# EAGLE board PCB-3 v24 (EAGLE 9.7.0)
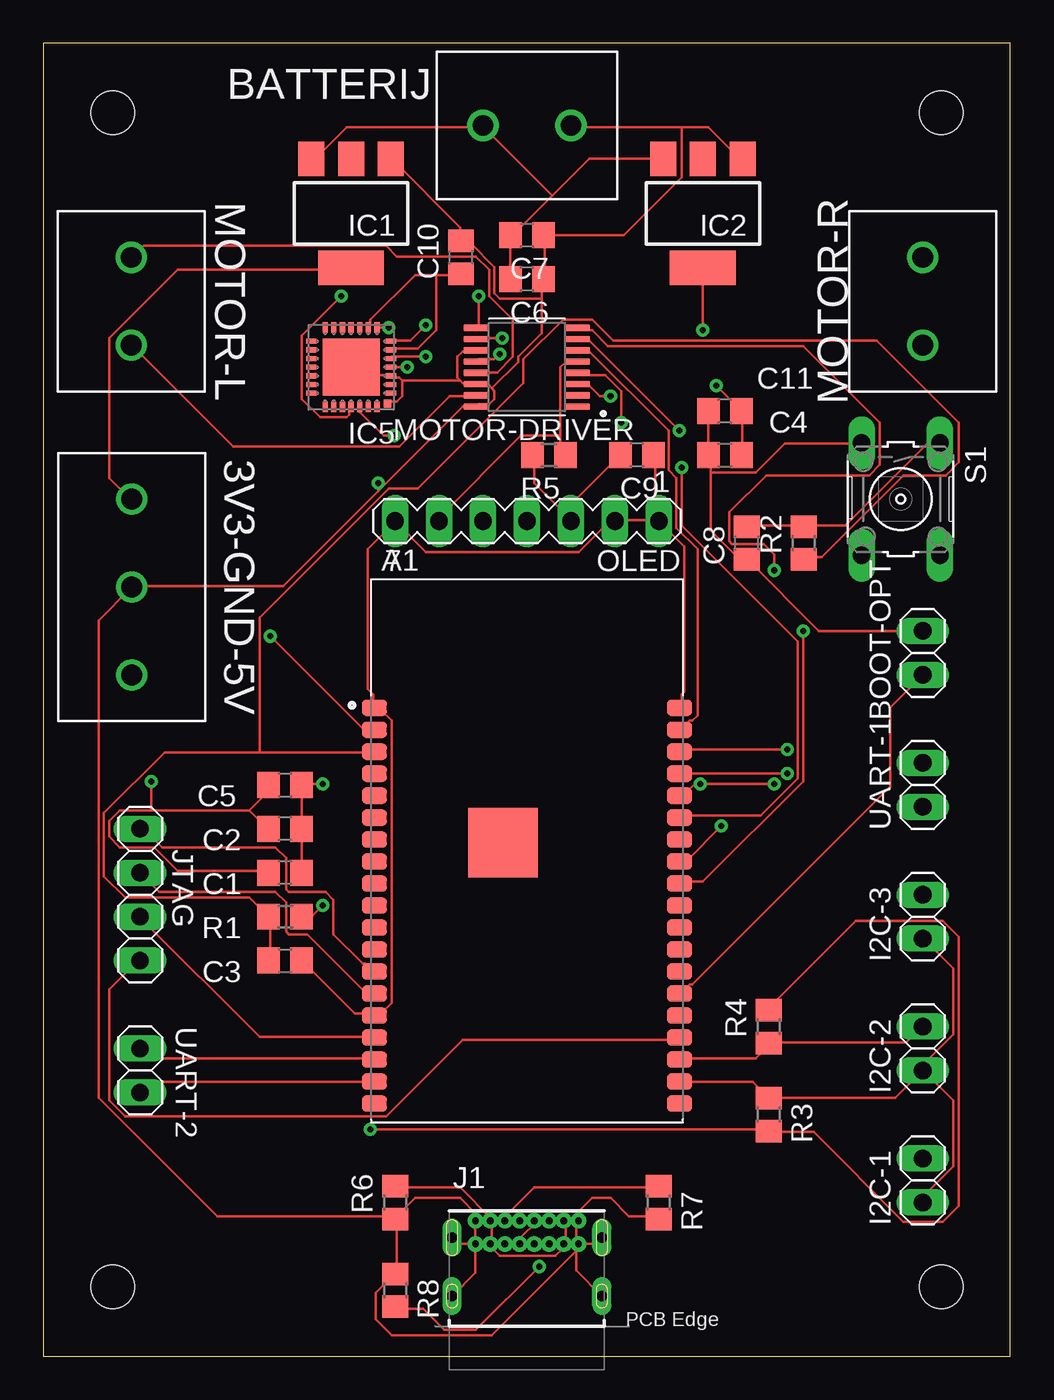
[diagram p0: board, top side]
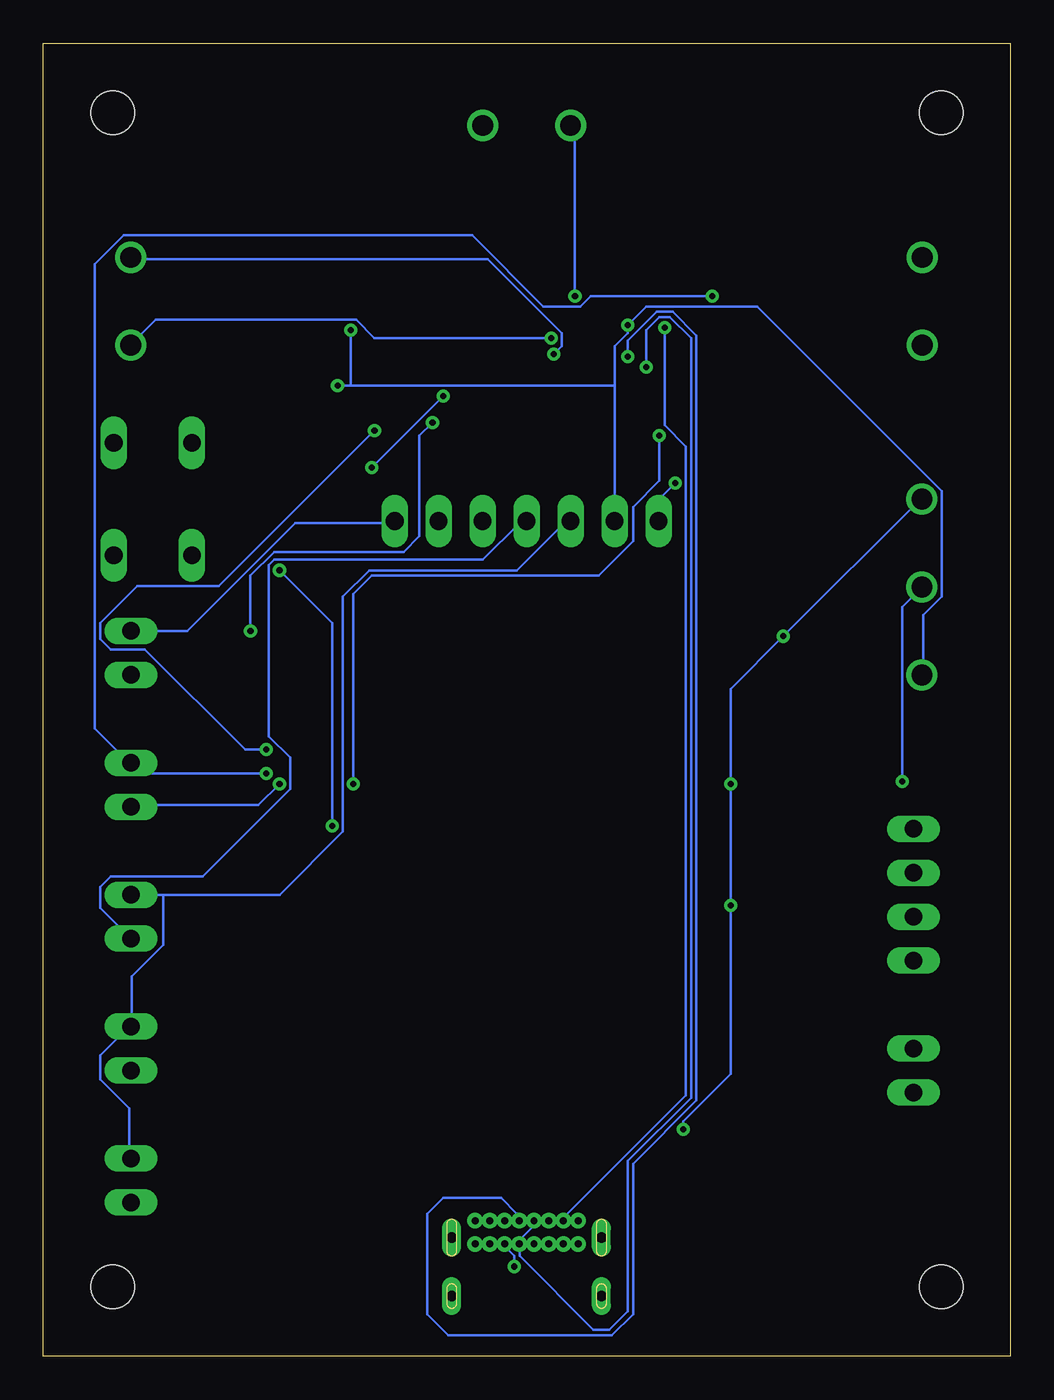
[diagram p1: board, bottom side, seen from below]

Size 55.86 x 75.87 mm. Coordinates in mm from the lower left corner, seen from the top.
Outline: 23.32,7.6 23.32,7.63 23.32,7.66 23.32,7.68 23.33,7.71 23.34,7.73 23.36,7.75 23.37,7.78 23.39,7.8 23.4,7.82 23.42,7.84 23.44,7.85 23.46,7.86 23.49,7.88 23.51,7.89 23.54,7.89 23.56,7.9 23.59,7.9 23.61,7.91 23.64,7.9 23.67,7.9 23.69,7.89 23.72,7.89 23.74,7.88 23.77,7.86 23.79,7.85 23.81,7.84 23.83,7.82 23.84,7.8 23.86,7.78 23.88,7.75 23.89,7.73 23.9,7.71 23.91,7.68 23.91,7.66 23.91,7.63 23.91,7.6 23.91,6.1 23.91,6.08 23.91,6.05 23.91,6.03 23.9,6 23.89,5.98 23.88,5.95 23.86,5.93 23.84,5.91 23.83,5.89 23.81,5.88 23.79,5.86 23.77,5.84 23.74,5.83 23.72,5.82 23.69,5.81 23.67,5.81 23.64,5.81 23.61,5.8 23.59,5.81 23.56,5.81 23.54,5.81 23.51,5.82 23.49,5.83 23.46,5.84 23.44,5.86 23.42,5.88 23.4,5.89 23.39,5.91 23.37,5.93 23.36,5.95 23.34,5.98 23.33,6 23.32,6.03 23.32,6.05 23.32,6.08 23.32,6.1 23.32,7.6
Outline: 32.01,4.02 32.02,4.05 32.03,4.07 32.05,4.09 32.07,4.1 32.09,4.12 32.12,4.13 32.14,4.15 32.16,4.16 32.19,4.16 32.21,4.17 32.24,4.17 32.27,4.17 32.29,4.17 32.32,4.17 32.34,4.16 32.37,4.16 32.39,4.15 32.41,4.13 32.44,4.12 32.46,4.1 32.48,4.09 32.49,4.07 32.51,4.05 32.52,4.02 32.54,4 32.55,3.98 32.55,3.95 32.56,3.93 32.56,3.9 32.56,3.88 32.56,3.07 32.56,3.05 32.56,3.02 32.55,3 32.55,2.97 32.54,2.95 32.52,2.92 32.51,2.9 32.49,2.88 32.48,2.86 32.46,2.84 32.44,2.83 32.41,2.81 32.39,2.8 32.37,2.79 32.34,2.78 32.32,2.78 32.29,2.78 32.27,2.77 32.24,2.78 32.21,2.78 32.19,2.78 32.16,2.79 32.14,2.8 32.12,2.81 32.09,2.83 32.07,2.84 32.05,2.86 32.03,2.88 32.02,2.9 32.01,2.92 31.99,2.95 31.98,2.97 31.98,3 31.97,3.02 31.97,3.05 31.96,3.07 31.96,3.88 31.97,3.9 31.97,3.93 31.98,3.95 31.98,3.98 31.99,4 32.01,4.02
Outline: 31.96,7.6 31.97,7.63 31.97,7.66 31.98,7.68 31.98,7.71 31.99,7.73 32.01,7.75 32.02,7.78 32.03,7.8 32.05,7.82 32.07,7.84 32.09,7.85 32.12,7.86 32.14,7.88 32.16,7.89 32.19,7.89 32.21,7.9 32.24,7.9 32.27,7.91 32.29,7.9 32.32,7.9 32.34,7.89 32.37,7.89 32.39,7.88 32.41,7.86 32.44,7.85 32.46,7.84 32.48,7.82 32.49,7.8 32.51,7.78 32.52,7.75 32.54,7.73 32.55,7.71 32.55,7.68 32.56,7.66 32.56,7.63 32.56,7.6 32.56,6.1 32.56,6.08 32.56,6.05 32.55,6.03 32.55,6 32.54,5.98 32.52,5.95 32.51,5.93 32.49,5.91 32.48,5.89 32.46,5.88 32.44,5.86 32.41,5.84 32.39,5.83 32.37,5.82 32.34,5.81 32.32,5.81 32.29,5.81 32.27,5.8 32.24,5.81 32.21,5.81 32.19,5.81 32.16,5.82 32.14,5.83 32.12,5.84 32.09,5.86 32.07,5.88 32.05,5.89 32.03,5.91 32.02,5.93 32.01,5.95 31.99,5.98 31.98,6 31.98,6.03 31.97,6.05 31.97,6.08 31.96,6.1 31.96,7.6
Outline: 23.32,3.95 23.33,3.98 23.34,4 23.36,4.02 23.37,4.05 23.39,4.07 23.4,4.09 23.42,4.1 23.44,4.12 23.46,4.13 23.49,4.15 23.51,4.16 23.54,4.16 23.56,4.17 23.59,4.17 23.61,4.17 23.64,4.17 23.67,4.17 23.69,4.16 23.72,4.16 23.74,4.15 23.77,4.13 23.79,4.12 23.81,4.1 23.83,4.09 23.84,4.07 23.86,4.05 23.88,4.02 23.89,4 23.9,3.98 23.91,3.95 23.91,3.93 23.91,3.9 23.91,3.88 23.91,3.07 23.91,3.05 23.91,3.02 23.91,3 23.9,2.97 23.89,2.95 23.88,2.92 23.86,2.9 23.84,2.88 23.83,2.86 23.81,2.84 23.79,2.83 23.77,2.81 23.74,2.8 23.72,2.79 23.69,2.78 23.67,2.78 23.64,2.78 23.61,2.77 23.59,2.78 23.56,2.78 23.54,2.78 23.51,2.79 23.49,2.8 23.46,2.81 23.44,2.83 23.42,2.84 23.4,2.86 23.39,2.88 23.37,2.9 23.36,2.92 23.34,2.95 23.33,2.97 23.32,3 23.32,3.02 23.32,3.05 23.32,3.07 23.32,3.88 23.32,3.9 23.32,3.93 23.32,3.95
Outline: 0,75.87 0,0 55.86,0 55.86,75.87 0,75.87
Copper layers (1*16): Top 0.035mm / dielectric 1.5mm / Bottom 0.035mm
Design rules "default": minimum track width 6mil, minimum drill 0.35mm, track to track 6mil, track to pad 6mil, pad to pad 6mil, via to via 6mil, smd to smd 6mil, copper to edge 40mil, drill to drill 6mil, minimum pad ring 10mil, minimum via ring 8mil, stop-mask expansion 4mil, vias tented up to drill 0mil, thermal gap 10mil
Holes 2.5 mm at 4,71.87 51.86,71.87 4,4 51.86,4

## Footprints (pad centres in the part's own frame; a part is rotated, then mirrored left to right if it is on the bottom)
TERMBLK_508-3N = drill 1.2: 1 0,0; 2 5.08,0; 3 10.16,0
XCVR_ESP32-WROVER-I = smd 1.45 x 0.93: 1 -8.81,8.26; 2 -8.81,6.99; 3 -8.81,5.72; 4 -8.81,4.45; 5 -8.81,3.18; 6 -8.81,1.91; 7 -8.81,0.64; 8 -8.81,-0.63; 9 -8.81,-1.9; 10 -8.81,-3.17; 11 -8.81,-4.44; 12 -8.81,-5.71; 13 -8.81,-6.98; 14 -8.81,-8.25; 15 -8.81,-9.52; 16 -8.81,-10.79; 17 -8.81,-12.06; 18 -8.81,-13.33; 19 -8.81,-14.6; 20 8.81,-14.6; 21 8.81,-13.33; 22 8.81,-12.06; 23 8.81,-10.79; 24 8.81,-9.52; 25 8.81,-8.25; 26 8.81,-6.98; 27 8.81,-5.71; 28 8.81,-4.44; 29 8.81,-3.17; 30 8.81,-1.9; 31 8.81,-0.63; 32 8.81,0.64; 33 8.81,1.91; 34 8.81,3.18; 35 8.81,4.45; 36 8.81,5.72; 37 8.81,6.99; 38 8.81,8.26 | smd 4 x 4: 39 -1.38,0.47
TERMBLK_508-2N = drill 1.2: 1 0,0; 2 5.08,0
1X02 = drill 1.016 long: 1 -1.27,0; 2 1.27,0
C0805 = smd 1.3 x 1.5: 1 -0.95,0; 2 0.95,0
SOT223 = smd 1.5 x 2: 1 -2.3,-3.15; 2 0,-3.15; 3 2.3,-3.15 | smd 3.8 x 2: 4 0,3.15
MLP28 = smd 0.6 x 0.3: 1 -2.3,1.5; 2 -2.3,1; 3 -2.3,0.5; 4 -2.3,0; 5 -2.3,-0.5; 6 -2.3,-1; 7 -2.3,-1.5; 15 2.3,-1.5; 16 2.3,-1; 17 2.3,-0.5; 18 2.3,0; 19 2.3,0.5; 20 2.3,1; 21 2.3,1.5 | smd 0.3 x 0.6: 8 -1.5,-2.3; 9 -1,-2.3; 10 -0.5,-2.3; 11 0,-2.3; 12 0.5,-2.3; 13 1,-2.3; 14 1.5,-2.3; 22 1.5,2.3; 23 1,2.3; 24 0.5,2.3; 25 0,2.3; 26 -0.5,2.3; 27 -1,2.3; 28 -1.5,2.3 | smd 3.3 x 3.3: EXP 0,0 | smd 0.435 x 0.435: M -2.103,2.103
GCT_USB4085-GF-A_REVA4 = drill 0.4 pad 0.65: A1 -2.975,4.025; A4 -2.125,4.025; A5 -1.275,4.025; A6 -0.425,4.025; A7 0.425,4.025; A8 1.275,4.025; A9 2.125,4.025; A12 2.975,4.025; B1 2.975,2.675; B4 2.125,2.675; B5 1.275,2.675; B6 0.425,2.675; B7 -0.425,2.675; B8 -1.275,2.675; B9 -2.125,2.675; B12 -2.975,2.675 | drill 0.6 pad 1.108 long: P1 -4.325,3.045; P2 4.325,3.045; P3 4.325,-0.335; P4 -4.325,-0.335
1X04 = drill 1.016 long: 1 -3.81,0; 2 -1.27,0; 3 1.27,0; 4 3.81,0
SOP65P640X110-16N = smd 1.49 x 0.4: 1 -2.915,2.275; 2 -2.915,1.625; 3 -2.915,0.975; 4 -2.915,0.325; 5 -2.915,-0.325; 6 -2.915,-0.975; 7 -2.915,-1.625; 8 -2.915,-2.275; 9 2.915,-2.275; 10 2.915,-1.625; 11 2.915,-0.975; 12 2.915,-0.325; 13 2.915,0.325; 14 2.915,0.975; 15 2.915,1.625; 16 2.915,2.275
MA07-1 = drill 1.016 long: 1 -7.62,0; 2 -5.08,0; 3 -2.54,0; 4 0,0; 5 2.54,0; 6 5.08,0; 7 7.62,0
R0805 = smd 1.3 x 1.5: 1 -0.95,0; 2 0.95,0
B3F-10XX = drill 1.016 long: 1 -3.251,2.261; 2 3.251,2.261; 3 -3.251,-2.261; 4 3.251,-2.261

## Placement (x,y rotation side)
3V3-GND-5V  2828XX-3282837-3  [TERMBLK_508-3N]  5.11,49.53 270 top
A1  ESP32-WROVER-I  [XCVR_ESP32-WROVER-I]  27.94,29.21 0 top
BATTERIJ  2828XX-2282837-2  [TERMBLK_508-2N]  25.4,71.12 0 top
BOOT-OPT  PINHD-1X2  [1X02]  50.8,40.64 90 top
C1  22uF  [C0805]  13.97,27.94 180 top
C2  0.1uF  [C0805]  13.97,30.48 180 top
C3  0.1uF  [C0805]  13.97,22.86 0 top
C4  10uF  [C0805]  39.37,52.07 0 top
C5  10uF  [C0805]  13.97,33.02 0 top
C6  100nF  [C0805]  27.94,62.23 180 top
C7  100nF  [C0805]  27.94,64.77 180 top
C8  0.1uF  [C0805]  40.64,46.99 90 top
C9  100nF  [C0805]  34.29,52.07 180 top
C10  1uF  [C0805]  24.13,63.5 90 top
C11  1uF  [C0805]  39.37,54.61 180 top
I2C-1  PINHD-1X2  [1X02]  50.8,10.16 90 top
I2C-2  PINHD-1X2  [1X02]  50.8,17.78 90 top
I2C-3  PINHD-1X2  [1X02]  50.8,25.4 90 top
IC1  LD117AS33TR  [SOT223]  17.78,66.04 180 top
IC2  LD117AS50TR  [SOT223]  38.1,66.04 180 top
IC5  CP2102  [MLP28]  17.78,57.15 180 top
J1  USB4085-GF-A_REVA4  [GCT_USB4085-GF-A_REVA4]  27.94,3.81 0 top
JTAG  PINHD-1X4  [1X04]  5.59,26.67 270 top
MOTOR-DRIVER  TC78H621FNG  [SOP65P640X110-16N]  27.94,57.15 180 top
MOTOR-L  2828XX-2282837-2  [TERMBLK_508-2N]  5.08,58.42 90 top
MOTOR-R  2828XX-2282837-2  [TERMBLK_508-2N]  50.8,63.5 270 top
OLED  [MA07-1]  27.94,48.26 180 top
R1  10k  [R0805]  13.97,25.4 180 top
R2  10k  [R0805]  43.93,46.99 90 top
R3  4k7  [R0805]  41.91,13.97 270 top
R4  4k7  [R0805]  41.91,19.05 90 top
R5  10k  [R0805]  29.21,52.07 180 top
R6  10k  [R0805]  20.32,8.89 90 top
R7  5.1k  [R0805]  35.56,8.89 270 top
R8  5.1k  [R0805]  20.32,3.81 270 top
S1  [B3F-10XX]  49.53,49.53 270 top
UART-1  PINHD-1X2  [1X02]  50.8,33.02 90 top
UART-2  PINHD-1X2  [1X02]  5.59,16.51 270 top

## Library data of the parts
3V3-GND-5V = Connector; CATEGORY: Connector; DESCRIPTION: TERM BLK 3P SIDE ENT 5.08mm PCB; MANUFACTURER: TE Connectivity; MPN: 282837-3; OPERATING_TEMPERATURE: -40°C to +105°C; PART_STATUS: Active; ROHS_COMPLIANCE: RoHS Compliant; SERIES: 282837; SUBCATEGORY: Terminal Block; TYPE: Side Wire Entry
A1 = ESP32-WROVER-I; DESCRIPTION: Module: combo; GPIO, I2C x2, I2S x2, SDIO, SPI x3, UART x3; U.FL; DIGI-KEY_PART_NUMBER: 1904-1008-1-ND; DIGI-KEY_PURCHASE_URL: https://www.digikey.com/product-detail/en/espressif-systems/ESP32-WROVER-I/1904-1008-1-ND/8544303?utm_source=snapeda&utm_medium=aggregator&utm_campaign=symbol; MF: Espressif Systems; MP: ESP32-WROVER-I; PACKAGE: Module Espressif Systems
BATTERIJ MOTOR-L MOTOR-R = Connector; CATEGORY: Connector; DESCRIPTION: 2 Position Wire to Board Terminal Block Horizontal with Board 5.08 mm Through Hole; MANUFACTURER: TE Connectivity; MPN: 282837-2; OPERATING_TEMPERATURE: -40°C to +105°C; PART_STATUS: ACTIVE; ROHS_COMPLIANCE: RoHS Compliant; SERIES: 282837; SUBCATEGORY: Terminal Block; TYPE: Side Wire Entry
BOOT-OPT I2C-1-I2C-3 JTAG UART-1 UART-2 = Connector; CATEGORY: CONNECTOR; SUB-CATEGORY: PIN-HEADER
C1-C11 = rcl; SPICEPREFIX: C
IC1 IC2 = v-reg
IC5 = silabs; MF: FARNELL; MPN: CP2102-GM; OC_FARNELL: 9282130; OC_NEWARK: 30K5635
J1 = USB4085-GF-A_REVA4; MANUFACTURER: Global Connector Technology; MAXIMUM_PACKAGE_HEIGHT: 3.46mm; PARTREV: A4; STANDARD: Manufacturer Recommendations
MOTOR-DRIVER = TC78H621FNG
OLED = con-lstb; OC_FARNELL: unknown; OC_NEWARK: unknown
R1-R8 = rcl; SPICEPREFIX: R
S1 = switch-omron; MPN: B3F-1000; OC_FARNELL: 176432; OC_NEWARK: 36M3542

## Nets
3V3: 3V3-GND-5V.1 A1.2 C1.1 C2.1 C5.2 IC1.4 R1.1 R3.2 R4.2
5V: 3V3-GND-5V.3 C4.2 C11.1 IC2.4 IC5.7 MOTOR-DRIVER.5 OLED.6 R5.1
7V: BATTERIJ.1 C6.2 C7.2 IC1.3 IC2.3 MOTOR-DRIVER.9
AO1: MOTOR-DRIVER.15 MOTOR-L.1
AO2: MOTOR-DRIVER.13 MOTOR-L.2
BO1: MOTOR-DRIVER.12 MOTOR-R.1
BO2: MOTOR-DRIVER.10 MOTOR-R.2
D+: IC5.4 J1.A6 J1.B6
D-: IC5.5 J1.A7 J1.B7
EN: A1.3 C3.1 R1.2 R2.1
EXP: A1.39
GND: 3V3-GND-5V.2 A1.1 A1.15 A1.38 BATTERIJ.2 BOOT-OPT.2 C1.2 C2.2 C3.2 C4.1 C5.1 C6.1 C7.1 C8.1 C9.1 C10.2 C11.2 IC1.1 IC2.1 IC5.3 IC5.EXP IC5.M J1.A1 J1.A12 J1.B1 J1.B12 J1.P1 J1.P2 J1.P3 J1.P4 MOTOR-DRIVER.11 MOTOR-DRIVER.14 MOTOR-DRIVER.16 OLED.1 OLED.2 OLED.7 R6.1 R7.2 R8.1 S1.3
IO0: A1.25 BOOT-OPT.1
IO12: A1.14 JTAG.2
IO13: A1.16 JTAG.3
IO14: A1.13 JTAG.1
IO15: A1.23 JTAG.4
IO18: A1.30 MOTOR-DRIVER.4
IO19: A1.31 MOTOR-DRIVER.8
IO21: A1.33 MOTOR-DRIVER.3
IO22: A1.36 MOTOR-DRIVER.7
IO23: A1.37 MOTOR-DRIVER.6
N$1: J1.A5 R7.1
N$2: C9.2 OLED.3 R5.2
N$3: C8.2 R2.2 S1.1
N$4: J1.B5 R8.2
N$5: C10.1 IC5.6 IC5.9
RX-1: A1.34 IC5.26 UART-1.1
RX-2: A1.17 UART-2.1
SCL: A1.22 I2C-1.2 I2C-2.2 I2C-3.2 OLED.5 R4.1
SDA: A1.21 I2C-1.1 I2C-2.1 I2C-3.1 OLED.4 R3.1
TX-1: A1.35 IC5.25 UART-1.2
TX-2: A1.18 UART-2.2
VBUS: IC5.8 J1.A4 J1.A9 J1.B4 J1.B9 R6.2

## Tracks (layer width: path | path; a pad name or v marks a point on that pad's centre or on a via)
3V3  (via drill 0.35)
  Top 0.152: R4.2 41.91,20.12 46.94,25.15 51.97,25.15 52.88,24.23 52.88,8.69 51.97,7.77 49.68,7.77 44.5,12.95 41.91,12.95 R3.2 41.91,13.11 v18.9,13.11 | 14.94,30.48 14.94,28.04 C1.1 | 14.94,30.48 14.94,32.92 C5.2 14.94,33.07 v16.15,33.07 | 14.94,30.48 C2.1 | v13.11,41.61 18.44,36.27 19.05,36.27 A1.2 | v16.15,26.06 15.54,25.45 14.94,25.45 R1.1 | IC1.4 17.68,62.79 7.77,62.79 3.81,58.83 3.81,50.75 5.03,49.53 3V3-GND-5V.1
  Bottom 0.152: 3V3-GND-5V.1 5.18,49.53 v13.11,41.61 16.15,38.56 v16.15,33.07 v16.15,26.06 16.15,16.31 18.9,13.56 v18.9,13.11
5V  (via drill 0.35)
  Top 0.152: 29.87,53.19 29.87,52.27 30.02,52.12 R5.1 | 29.87,53.19 29.87,57.15 30.18,57.45 30.79,57.45 MOTOR-DRIVER.5 | C4.2 40.39,52.12 40.39,54.56 C11.1 40.23,54.71 v38.86,56.08 | v22.1,59.59 21.18,58.67 20.12,58.67 IC5.7 | 29.87,53.19 27.58,53.19 22.86,48.46 OLED.6 | v38.1,59.28 IC2.4
  Bottom 0.152: OLED.6 22.86,56.08 | 22.86,56.08 22.86,58.37 22.1,59.13 v22.1,59.59 21.03,60.66 14.63,60.66 3.96,49.99 3.96,43.89 5.03,42.82 5.03,39.47 3V3-GND-5V.3 | 22.86,56.08 38.1,56.08 | 38.1,56.08 v38.86,56.08 | 38.1,56.08 v38.1,59.28
7V  (via drill 0.35)
  Top 0.152: C6.2 26.98,62.33 26.98,64.77 C7.2 27.13,64.77 29.41,67.06 | 29.41,67.06 31.55,69.19 35.66,69.19 IC2.3 | v25.15,61.27 25.15,59.44 MOTOR-DRIVER.9 | IC1.3 15.54,69.34 15.85,69.34 17.53,71.02 25.3,71.02 BATTERIJ.1 25.45,71.02 29.41,67.06
  Bottom 0.152: v25.15,61.27 25.15,70.87 BATTERIJ.1
AO1
  Top 0.152: MOTOR-DRIVER.15 24.99,55.47 23.47,55.47 20.57,52.58 10.97,52.58 5.18,58.37 MOTOR-L.1
AO2
  Top 0.152: MOTOR-DRIVER.13 25.15,56.84 26.21,56.84 27.13,57.76 27.13,59.89 25.76,61.27 25.76,62.79 24.99,63.55 20.42,63.55 19.81,64.16 5.79,64.16 5.18,63.55 MOTOR-L.2
BO1  (via drill 0.35)
  Top 0.152: v26.36,57.91 26.06,57.61 25.15,57.61 MOTOR-DRIVER.12
  Bottom 0.152: v26.36,57.91 25.91,58.37 25.91,59.13 30.18,63.4 50.75,63.4 MOTOR-R.1
BO2  (via drill 0.35)
  Top 0.152: v26.52,58.83 25.15,58.83 MOTOR-DRIVER.10
  Bottom 0.152: v26.52,58.83 36.73,58.83 37.8,59.89 49.38,59.89 50.75,58.52 MOTOR-R.2
D+  (via drill 0.35)
  Top 0.152: v21.03,57.15 IC5.4
  Bottom 0.152: v21.03,57.15 21.03,59.28 20.27,60.05 19.66,60.05 18.44,58.83 18.44,14.93 22.1,11.28 22.1,2.59 23.16,1.52 24.08,1.52 28.35,5.79 28.35,6.4 J1.B6 28.5,6.55 27.58,7.47 27.58,7.77 J1.A6
D-  (via drill 0.35)
  Top 0.152: v22.1,57.76 20.12,57.76 IC5.5 | J1.B7 27.58,6.55 27.58,6.86 28.5,7.77 J1.A7
  Bottom 0.152: v22.1,57.76 22.1,58.67 20.42,60.35 19.51,60.35 18.14,58.98 18.14,14.78 21.79,11.12 21.79,2.44 23.01,1.22 32.46,1.22 33.68,2.44 33.68,8.23 32.77,9.14 29.41,9.14 28.5,8.23 28.5,7.92 J1.A7
EN
  Top 0.152: 12.5,34.9 7.01,34.9 3.5,31.39 3.5,27.74 4.72,26.52 11.89,26.52 12.95,25.45 R1.2 13.11,25.3 13.11,22.86 C3.1 | 12.5,34.9 19.05,34.9 A1.3 | 12.5,34.9 12.5,42.67 19.96,50.14 21.64,50.14 27.74,56.24 27.74,57.61 30.02,59.89 31.7,59.89 32.92,58.67 48.16,58.67 52.88,53.95 52.88,51.66 52.12,50.9 49.68,50.9 44.96,46.18 44.04,46.18 R2.1
GND  (via drill 0.35)
  Top 0.152: C11.2 38.41,54.56 38.41,52.12 C4.1 38.56,51.97 38.56,51.05 | 38.56,51.05 38.56,47.7 40.08,46.18 40.54,46.18 C8.1 40.69,46.02 44.81,41.91 BOOT-OPT.2 | 38.56,51.05 41.15,51.05 42.82,52.73 47.24,52.73 S1.3 | A1.38 36.88,37.49 36.88,38.25 37.03,38.41 37.03,46.79 OLED.1 35.51,48.31 | 35.51,48.31 35.36,48.46 35.36,51.97 C9.1 | 35.51,48.31 33.07,48.31 OLED.2 32.92,48.16 32.61,48.16 30.94,46.48 22.1,46.48 OLED.7 20.27,48.16 18.75,46.63 18.75,38.56 19.05,38.25 19.05,37.49 A1.1 19.2,37.34 19.51,37.34 20.12,36.73 20.12,20.42 19.51,19.81 19.2,19.81 A1.15 19.05,19.81 17.98,19.81 14.94,22.86 C3.2 | R7.2 35.51,8.08 33.83,8.08 32.77,9.14 31.7,9.14 30.79,8.23 30.79,7.92 J1.A12 30.79,7.77 30.79,6.55 J1.B1 | R6.1 20.42,7.92 20.42,4.88 R8.1 20.27,4.72 19.2,3.66 19.2,2.13 20.12,1.22 25.91,1.22 30.79,6.1 | R6.1 20.42,8.08 21.49,9.14 24.08,9.14 24.99,8.23 24.99,7.92 J1.A1 J1.B12 | 30.79,6.1 30.79,6.4 J1.B1 | 36.88,71.02 30.48,71.02 BATTERIJ.2 | 36.88,71.02 38.41,71.02 40.08,69.34 40.39,69.34 IC2.1 | 11.89,31.55 6.25,31.55 | 6.25,31.55 4.42,31.55 3.81,30.94 3.81,30.02 4.42,29.41 6.4,29.41 7.77,28.04 12.95,28.04 C1.2 | 11.89,31.55 12.95,30.48 C2.2 | 11.89,31.55 12.95,32.61 12.95,32.92 C5.1 | IC1.1 20.12,69.19 24.08,65.23 24.08,64.47 C10.2 24.23,64.31 24.69,64.31 26.06,62.94 26.06,61.42 26.36,61.11 28.8,61.11 | 20.73,56.39 20.73,55.47 20.42,55.17 19.96,55.17 IC5.M | 20.73,56.39 20.57,56.54 20.12,56.54 IC5.3 19.96,56.69 18.29,56.69 17.83,57.15 IC5.EXP | 28.96,64.77 28.96,62.33 C6.1 28.8,62.18 28.8,61.11 | 25.91,55.93 25.76,56.08 25.15,56.08 MOTOR-DRIVER.14 24.99,56.24 24.23,56.24 24.08,56.39
  Top 0.152: 25.91,55.93 26.06,55.78 26.06,55.32 25.76,55.02 25.15,55.02 MOTOR-DRIVER.16 24.99,54.86 24.23,54.86 19.36,49.99 | 24.08,56.39 23.93,56.54 23.93,57.76 24.23,58.06 24.99,58.06 MOTOR-DRIVER.11 | 28.8,61.11 28.8,59.13 27.43,57.76 27.43,57.45 25.91,55.93 | 24.08,56.39 20.73,56.39 | 19.36,49.99 13.87,44.5 5.18,44.5 3V3-GND-5V.2 5.03,44.35 3.2,42.52 3.2,14.93 10.06,8.08 20.27,8.08 R6.1 | v6.25,33.22 6.25,31.55 | 36.88,71.02 36.88,68.12 33.53,64.77 28.96,64.77 | 28.96,64.77 C7.1 | 19.36,49.99 v19.36,50.44 | J1.P1 23.98,6.48 J1.B12 | J1.P4 24.96,4.82 J1.B12 | J1.P2 31.89,6.48 J1.B1 | J1.P3 30.79,4.95 30.79,6.1
  Bottom 0.152: BOOT-OPT.2 47.55,41.91 41.3,48.16 35.66,48.16 OLED.1 | v6.25,33.22 6.25,43.28 5.18,44.35 3V3-GND-5V.2 | v19.36,50.44 20.27,49.53 20.27,48.31 OLED.7
IO0
  Top 0.152: BOOT-OPT.1 48.92,37.49 48.92,32.92 37.49,21.49 37.34,21.49 36.88,21.03 A1.25
IO12
  Top 0.152: JTAG.2 6.71,26.82 13.41,26.82 14.02,26.21 14.02,24.54 14.17,24.38 15.24,24.38 18.59,21.03 19.05,21.03 A1.14
IO13
  Top 0.152: A1.16 19.05,18.44 12.5,18.44 5.64,25.3 JTAG.3
IO14
  Top 0.152: JTAG.1 5.79,30.48 6.86,29.41 13.41,29.41 14.02,28.8 14.02,26.98 14.17,26.82 16.31,26.82 16.76,26.36 16.76,24.38 18.44,22.71 18.59,22.71 19.05,22.25 A1.13
IO15
  Top 0.152: A1.23 36.73,18.29 24.23,18.29 19.81,13.87 4.72,13.87 3.81,14.78 3.81,21.18 5.49,22.86 JTAG.4
IO18  (via drill 0.35)
  Top 0.152: v43.89,41.91 43.89,33.22 38.1,27.43 36.88,27.43 A1.30 | v33.38,53.95 33.38,55.78 32.46,56.69 30.94,56.69 MOTOR-DRIVER.4
  Bottom 0.152: v43.89,41.91 43.89,45.11 42.52,46.48 35.05,46.48 34.14,47.4 34.14,53.19 v33.38,53.95
IO19  (via drill 0.35)
  Top 0.152: v39.17,30.63 37.19,28.65 36.88,28.65 A1.31 | v42.22,45.41 42.22,46.33 41.6,46.94 39.78,46.94 39.62,47.09 39.62,48.77 41.76,50.9 47.7,50.9 48.31,51.51 48.31,53.95 43.89,58.37 32.61,58.37 31.7,59.28 30.94,59.28 MOTOR-DRIVER.8
  Bottom 0.152: v39.17,30.63 39.17,42.37 v42.22,45.41
IO21  (via drill 0.35)
  Top 0.152: v36.88,51.36 36.88,48.01 43.59,41.3 43.59,33.38 41.45,31.24 36.88,31.24 A1.33 | v32.77,55.47 32.16,55.47 31.55,56.08 30.94,56.08 MOTOR-DRIVER.3
  Bottom 0.152: v32.77,55.47 v36.88,51.36
IO22  (via drill 0.35)
  Top 0.152: v42.98,35.05 36.88,35.05 A1.36 | v36.73,53.49 31.55,58.67 30.94,58.67 MOTOR-DRIVER.7
  Bottom 0.152: v42.98,35.05 44.2,35.05 49.99,40.84 51.97,40.84 52.58,41.45 52.58,42.37 50.44,44.5 45.72,44.5 v36.73,53.49
IO23
  Top 0.152: A1.37 36.88,36.27 37.34,36.73 37.49,36.73 37.8,37.03 37.8,46.63 36.58,47.85 36.58,50.75 36.12,51.21 36.12,53.49 31.55,58.06 30.94,58.06 MOTOR-DRIVER.6
N$1
  Top 0.152: R7.1 35.51,9.75 28.35,9.75 26.52,7.92 J1.A5
N$2
  Top 0.152: 30.02,48.77 30.48,48.31 OLED.3 30.02,48.77 | 30.02,48.77 28.35,50.44 28.35,51.97 R5.2 | 30.02,48.77 33.22,51.97 C9.2
N$3
  Top 0.152: C8.2 40.69,48.01 43.89,48.01 R2.2 44.04,48.01 46.33,48.01 51.05,52.73 51.66,52.73 S1.1
N$4  (via drill 0.35)
  Top 0.152: v28.65,5.18 24.99,1.52 23.16,1.52 21.95,2.74 20.42,2.74 R8.2
  Bottom 0.152: v28.65,5.18 28.65,5.79 29.26,6.4 J1.B5
N$5
  Top 0.152: 22.71,62.48 24.08,62.48 C10.1 | 22.71,62.48 21.49,62.48 18.9,59.89 18.9,59.59 IC5.9 | 22.71,62.48 22.71,59.28 21.64,58.22 20.12,58.22 IC5.6
RX-1  (via drill 0.35)
  Top 0.152: v20.27,53.19 19.66,53.19 18.29,54.56 18.29,54.71 IC5.26 | A1.34 36.88,32.31 37.64,33.07 v37.95,33.07 v42.22,33.07
  Bottom 0.152: v20.27,53.19 20.27,50.6 21.79,49.07 21.79,47.09 23.77,45.11 36.88,45.11 37.95,44.04 v37.95,33.07 | v42.22,33.07 43.43,31.85 50.75,31.85 UART-1.1
RX-2
  Top 0.152: A1.17 19.05,17.22 6.1,17.22 5.64,17.68 UART-2.1
SCL
  Top 0.152: A1.22 36.88,17.22 41.15,17.22 41.91,17.98 R4.1 41.91,18.14 49.84,18.14 50.75,19.05 I2C-2.2
  Bottom 0.152: I2C-1.2 50.9,11.43 50.9,14.33 52.58,16 52.58,17.37 50.9,19.05 I2C-2.2 50.75,19.05 50.75,21.95 48.92,23.77 48.92,26.67 | I2C-3.2 48.92,26.67 | 48.92,26.67 42.22,26.67 38.56,30.33 38.56,43.89 37.03,45.41 28.5,45.41 25.76,48.16 25.45,48.16 OLED.5
SDA
  Top 0.152: 41.91,14.93 41,15.85 36.88,15.85 A1.21 | I2C-1.1 50.9,8.99 50.9,9.3 52.58,10.97 52.58,14.78 50.9,16.46 I2C-2.1 | 41.91,14.93 49.23,14.93 I2C-2.1 | 41.91,14.93 R3.1 | I2C-2.1 50.9,16.61 50.9,16.92 52.58,18.59 52.58,22.4 50.9,24.08 I2C-3.1
  Bottom 0.152: I2C-3.1 52.58,25.91 52.58,27.13 51.97,27.74 46.63,27.74 41.6,32.77 41.6,34.59 42.82,35.81 42.82,45.72 42.52,46.02 30.48,46.02 28.35,48.16 28.04,48.16 OLED.4
TX-1  (via drill 0.35)
  Top 0.152: v17.22,61.27 14.94,58.98 14.94,55.32 16,54.25 17.53,54.25 17.68,54.41 17.68,54.71 IC5.25 | v42.98,33.68 36.88,33.68 A1.35
  Bottom 0.152: v17.22,61.27 24.23,61.27 24.84,60.66 26.98,60.66 31.09,64.77 51.21,64.77 52.88,63.09 52.88,36.27 50.9,34.29 UART-1.2 50.75,34.29 50.14,33.68 v42.98,33.68
TX-2
  Top 0.152: A1.18 19.05,15.85 6.25,15.85 5.64,15.24 UART-2.2
VBUS  (via drill 0.35)
  Top 0.152: J1.A9 30.18,7.77 30.18,6.55 J1.B4 30.02,6.4 30.02,6.25 29.57,5.79 26.36,5.79 25.76,6.4 J1.B9 25.91,6.55 25.91,7.77 J1.A4 25.91,7.92 24.08,9.75 20.42,9.75 R6.2 | v19.96,59.44 19.36,59.44 IC5.8
  Bottom 0.152: v19.96,59.44 19.96,53.8 18.75,52.58 18.75,15.09 25.91,7.92 J1.A4